# Altium PCB Fuse_Board_V2.PcbDoc
Units mil, origin at the board's own origin, x right, y up, seen from the top; angles counter-clockwise.
Board outline 5300 x 2200 mil, 2 copper layers (Top Layer, Bottom Layer); 46 components, 21 nets, 114 pads, 10 vias.
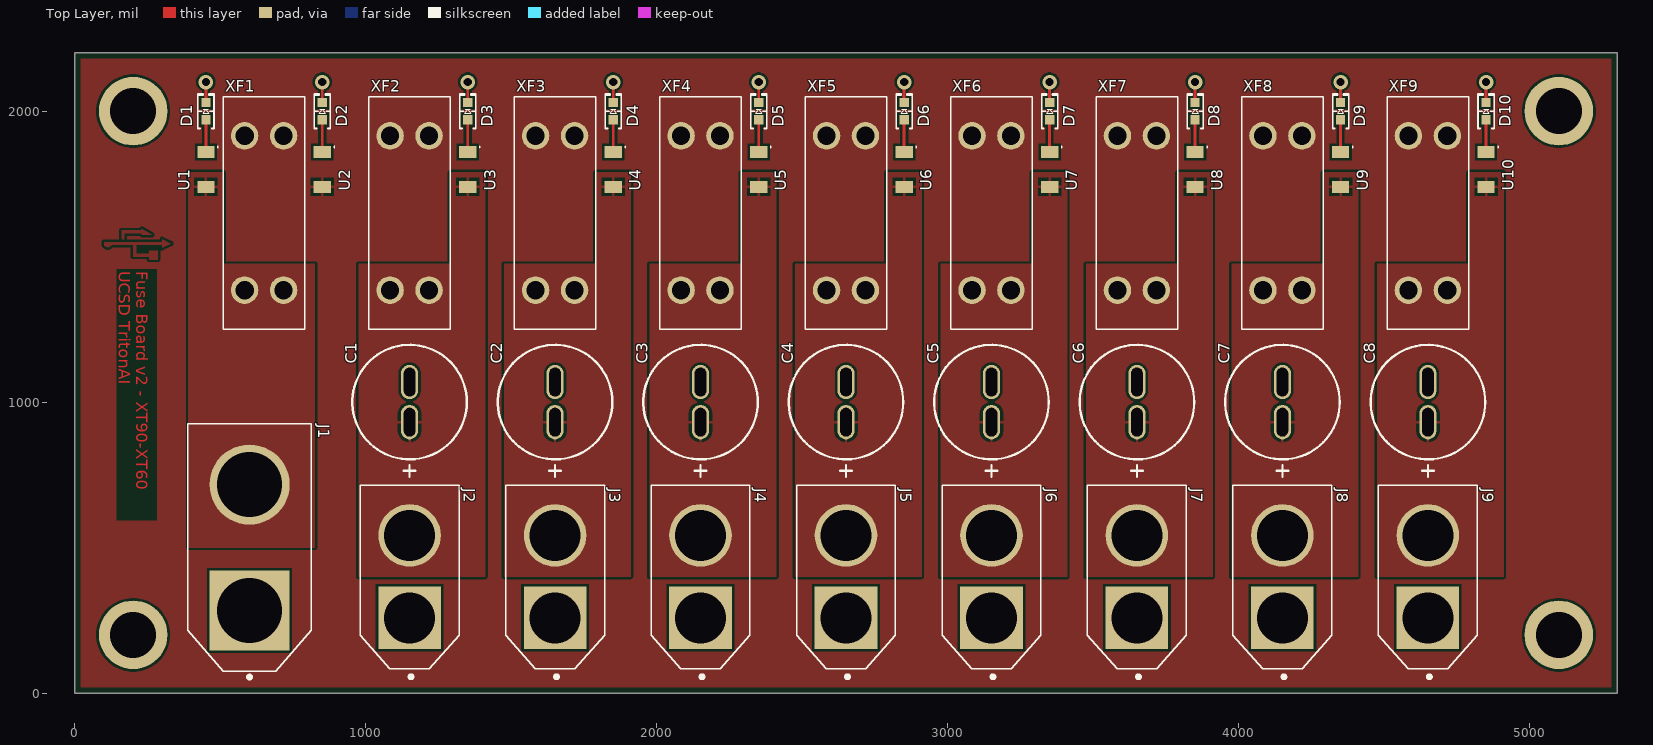
[diagram p0: Top Layer view]
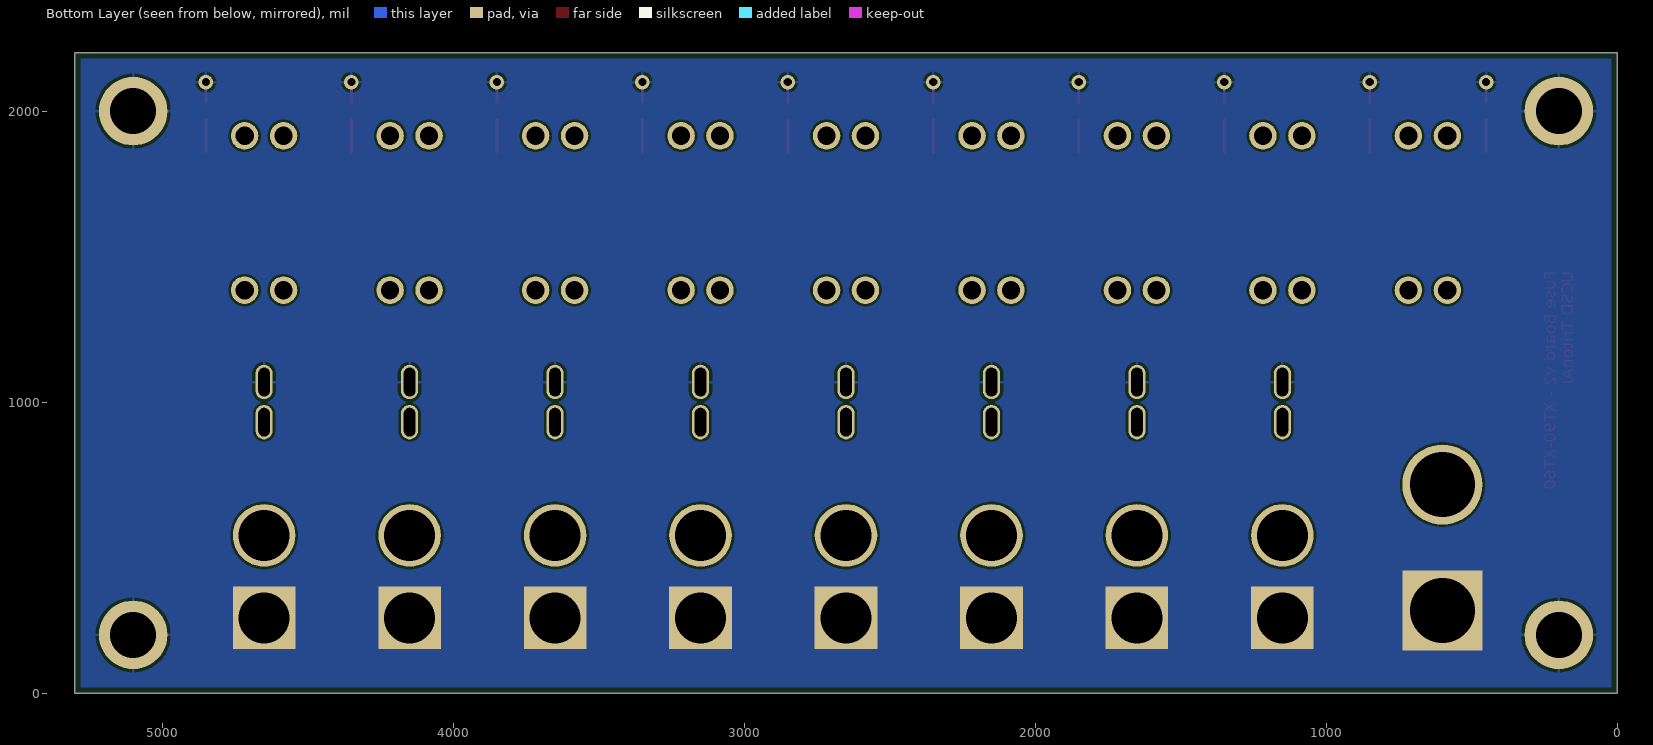
[diagram p1: Bottom Layer view, seen from below]
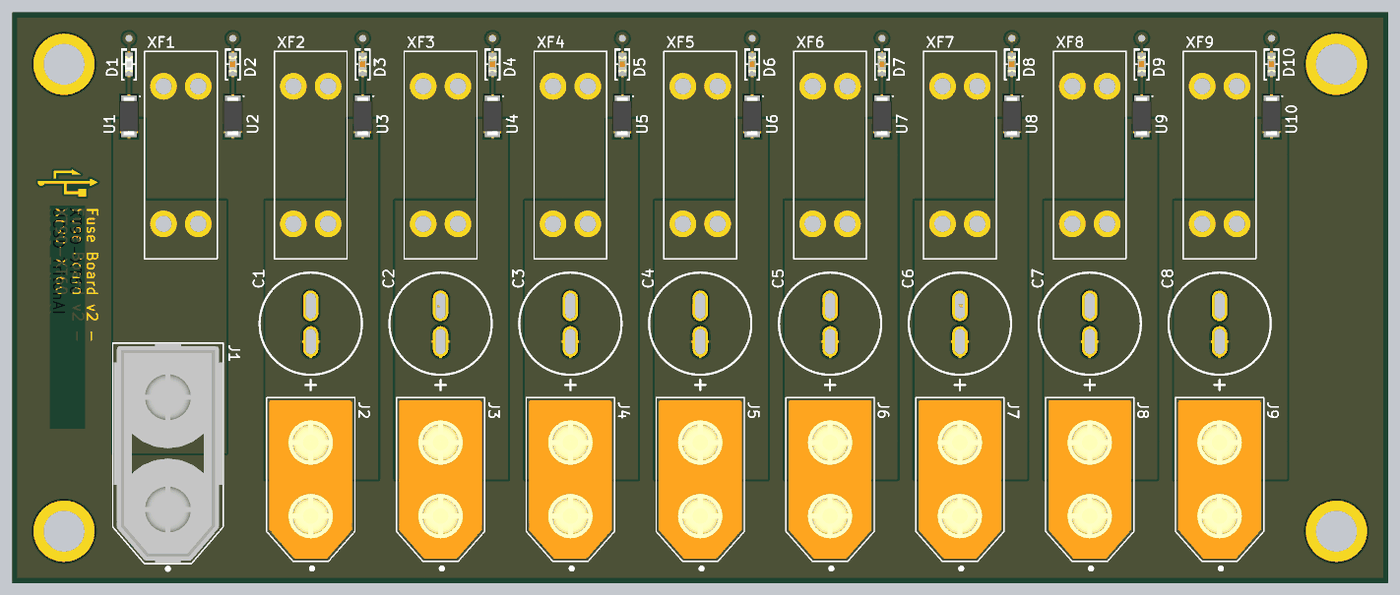
[diagram p2: 3D render of the assembled board from above, using the file's embedded part models]

## Layer stack, top to bottom
Top Solder: solder mask 0.4, Solder Resist, Dk 3.5
Top Layer: signal copper 1.4
Dielectric 1: dielectric 12.6, FR-4, Dk 4.8
Bottom Layer: signal copper 1.4
Bottom Solder: solder mask 0.4, Solder Resist, Dk 3.5

## Board outline
0,0 5300,0 5300,2200 0,2200

## Design rules (kind name [scope] priority, off if disabled: settings)
Clearance [All] p1: gap=7.87 ignorepadtopadclearanceinfootprint=FALSE except(5: Arc-Arc Arc-Track Track-Track SMDPad-SMDPad; 5.91: Arc-Text Track-Text SMDPad-Text THPad-Text Via-Text Fill-Text Poly-Text Region-Text Text-Text; 10: Arc-Via Arc-Hole Track-Via Track-Hole Via-Via; 12.99: Arc-THPad Track-THPad; 19.68: THPad-THPad)
DiffPairsRouting DiffPair_DIFF120DiffPairsRouting [InDifferentialPairClass('DIFF120')] p1: maxlimit=5 minlimit=5 mostfreqgap=5 toplayer_minwidth=5 toplayer_maxwidth=5 toplayer_prefwidth=5 bottomlayer_minwidth=5 bottomlayer_maxwidth=5 bottomlayer_prefwidth=5 maxuncoupledlength=500
DiffPairsRouting [All] p2: maxlimit=10 minlimit=5 mostfreqgap=10 toplayer_minwidth=5 toplayer_maxwidth=15 toplayer_prefwidth=15 bottomlayer_minwidth=5 bottomlayer_maxwidth=15 bottomlayer_prefwidth=15 maxuncoupledlength=500
HoleSize "Drill Hole" [InDrillLayerPair('Top Layer - Bottom Layer')] p1: absolutevalues=TRUE maxlimit=248.03 minlimit=7.87 maxpercent=80.000 minpercent=20.000
HoleSize [All] p2: absolutevalues=TRUE maxlimit=250 minlimit=7.87 maxpercent=80.000 minpercent=20.000
HoleToHoleClearance [All] p1: gap=19.68 allowstackedmicrovias=TRUE
MatchedLengths DiffPair_DIFF120MatchedLengths [InDifferentialPairClass('DIFF120')] p1: tolerance=1000 checknetsindiffpair=FALSE checkdiffpairvsdiffpair=TRUE checkxsignals=TRUE checkothers=TRUE
PolygonConnect PolygonConnect_Fuse_Holder [Name Like 'XF*'] p1: connectstyle=Direct reliefconductorwidth=10 reliefentries=4 polygonreliefangle="90 Angle" airgapwidth=10
PolygonConnect PolygonConnect_XT [Name Like 'J*'] p2: connectstyle=Direct reliefconductorwidth=10 reliefentries=4 polygonreliefangle="90 Angle" airgapwidth=10
PolygonConnect [All] p3: connectstyle=Relief reliefconductorwidth=10 reliefentries=4 polygonreliefangle="90 Angle" airgapwidth=10
RoutingVias [All] p1: holewidth=11.81 width=23.62 viastyle="Through Hole" minholewidth=11.81 minwidth=23.62 maxholewidth=248.03 maxwidth=248.03
SilkToSolderMaskClearance [IsPad] p1: minsilkscreentomaskgap=5.91 clearancetoexposedcopper=TRUE
SolderMaskExpansion [All] p1: expansion=4 istentingtop=FALSE
Width [All] p1: maxlimit=20 minlimit=5 preferedwidth=10
26 further rules are at their usual default settings.

## Components (designator, comment, footprint, x,y, rotation, side; value= is the part's Value field where it differs from the comment)
C1 "Capacitor Generic" RADIAL_CAP_10mm 1150,1000 r270 top
C2 "Capacitor Generic" RADIAL_CAP_10mm 1650,1000 r270 top
C3 "Capacitor Generic" RADIAL_CAP_10mm 2150,1000 r270 top
C4 "Capacitor Generic" RADIAL_CAP_10mm 2650,1000 r270 top
C5 "Capacitor Generic" RADIAL_CAP_10mm 3150,1000 r270 top
C6 "Capacitor Generic" RADIAL_CAP_10mm 3650,1000 r270 top
C7 "Capacitor Generic" RADIAL_CAP_10mm 4150,1000 r270 top
C8 "Capacitor Generic" RADIAL_CAP_10mm 4650,1000 r270 top
D1 "Green" "LED 0603_1608 GREEN" 450,2000 r90 top
D2 "Red" "LED 0603_1608 RED" 850,2000 r90 top
D3 "Red" "LED 0603_1608 RED" 1350,2000 r90 top
D4 "Red" "LED 0603_1608 RED" 1850,2000 r90 top
D5 "Red" "LED 0603_1608 RED" 2350,2000 r90 top
D6 "Red" "LED 0603_1608 RED" 2850,2000 r90 top
D7 "Red" "LED 0603_1608 RED" 3350,2000 r90 top
D8 "Red" "LED 0603_1608 RED" 3850,2000 r90 top
D9 "Red" "LED 0603_1608 RED" 4350,2000 r90 top
D10 "Red" "LED 0603_1608 RED" 4850,2000 r90 top
J1 "XT90PB-M" XT90PB-M 600,500 r90 top
J2 "XT60-M" AMASS_XT60-M 1150,400 r90 top
J3 "XT60-M" AMASS_XT60-M 1650,400 r90 top
J4 "XT60-M" AMASS_XT60-M 2150,400 r90 top
J5 "XT60-M" AMASS_XT60-M 2650,400 r90 top
J6 "XT60-M" AMASS_XT60-M 3150,400 r90 top
J7 "XT60-M" AMASS_XT60-M 3650,400 r90 top
J8 "XT60-M" AMASS_XT60-M 4150,400 r90 top
J9 "XT60-M" AMASS_XT60-M 4650,400 r90 top
U1 "AL5809-15P1-7" POWERDI_123 450,1800 r90 top
U2 "AL5809-15P1-7" POWERDI_123 850,1800 r90 top
U3 "AL5809-15P1-7" POWERDI_123 1350,1800 r90 top
U4 "AL5809-15P1-7" POWERDI_123 1850,1800 r90 top
U5 "AL5809-15P1-7" POWERDI_123 2350,1800 r90 top
U6 "AL5809-15P1-7" POWERDI_123 2850,1800 r90 top
U7 "AL5809-15P1-7" POWERDI_123 3350,1800 r90 top
U8 "AL5809-15P1-7" POWERDI_123 3850,1800 r90 top
U9 "AL5809-15P1-7" POWERDI_123 4350,1800 r90 top
U10 "AL5809-15P1-7" POWERDI_123 4850,1800 r90 top
XF1 "3557-2" FUSE_3557-2 650,1650 r90 top
XF2 "3557-2" FUSE_3557-2 1150,1650 r270 top
XF3 "3557-2" FUSE_3557-2 1650,1650 r270 top
XF4 "3557-2" FUSE_3557-2 2150,1650 r270 top
XF5 "3557-2" FUSE_3557-2 2650,1650 r270 top
XF6 "3557-2" FUSE_3557-2 3150,1650 r270 top
XF7 "3557-2" FUSE_3557-2 3650,1650 r270 top
XF8 "3557-2" FUSE_3557-2 4150,1650 r270 top
XF9 "3557-2" FUSE_3557-2 4650,1650 r270 top

## Footprints (in the part's own frame and the unit in brackets; to place one, negate y for a bottom-side part, rotate by r counter-clockwise, add the part's x,y. Pads: shape width x height; smd on the part's side, far side on the other; paste and mask are expansions set on the pad)
AMASS_XT60-M [mil]
  rect 215x215 hole 175: 1(-141.73,0)
  round 215 hole 175: 2(141.73,0)
  silkscreen extent -350,-170 315,170, body extent -305,-159 305,159, height 630
FUSE_3557-2 [mm]
  round 2.4 hole 1.6: 1(-6.735,-1.7) 1(-6.735,1.7) 2(6.735,-1.7) 2(6.735,1.7)
  silkscreen extent -10.16,-3.56 10.16,3.56, body extent -9.91,-3.38 9.91,3.38, height 7.4
"LED 0603_1608 GREEN" [mm] "Chip Diode, 2-Leads, Body 1.60x0.80mm, IPC Medium Density"
  rect 0.8x0.8 smd: 1(-0.75,0) 2(0.75,0)
  silkscreen extent -1.52,-0.7 1.52,0.7, body extent -0.8,-0.4 0.8,0.4, height 0.53
"LED 0603_1608 RED" [mm] "Chip Diode, 2-Leads, Body 1.60x0.80mm, IPC Medium Density"
  rect 0.8x0.8 smd: 1(-0.75,0) 2(0.75,0)
  silkscreen extent -1.52,-0.7 1.52,0.7, body extent -0.8,-0.4 0.8,0.4, height 0.53
POWERDI_123 [mm] "POWERDI-123, 2-Leads, Body 1.78x3.70mm"
  rect 1.05x1.5 smd: 1(-1.525,0) 2(1.525,0)
  silkscreen extent 1.9,-1.1 2,-1, body extent -1.85,-0.96 1.85,0.96, height 1
RADIAL_CAP_10mm [mm]
  oval 3x1.5 hole 1 slot 2.5 at 0 deg: 1(-1.75,0) 2(1.75,0)
  silkscreen extent -5,-5 6.51,5
XT90PB-M [mm]
  rect 7x7 hole 5.7: 1(-5.5,0)
  round 7 hole 5.7: 2(5.5,0)
  silkscreen extent -11.45,-5.4 10.8,5.4, body extent -10.7,-5.4 10.7,5.3, height 21

## Part data
C1 C2 C3 C4 C5 C6 C7 C8: "Cap Radial Aluminum Cylindrical Can 3.5mm, 5mm", Package="RADIAL-2 Panasonic", Availability="In Stock", Check_prices=https://www.snapeda.com/parts/ECA-2WHG220/Panasonic/view-part/390097/?ref=eda, MF=Panasonic, MP=ECA-2WHG220, Price=None, SnapEDA_Link=https://www.snapeda.com/parts/ECA-2WHG220/Panasonic/view-part/390097/?ref=snap
D1: library part LTST-C193TGKT-5A, "LED GREEN CLEAR CHIP SMD", Current - Test=5mA, Device Package="0603 (1608 Metric)", Lens Color=Colorless, Manufacturer="Lite-On Inc.", Millicandela Rating=154mcd, Supplier Device Package="Chip LED", Supplier Part Number 1=160-1832-1-ND, Voltage - Forward (Vf) (Typ)=2.8V, Color=Green, ComponentLink1Description=Datasheet, ComponentLink1URL=//media.digikey.com/pdf/Data%20Sheets/Lite-On%20PDFs/LTST-C193TGKT-5A.pdf, ComponentLink2Description="DigiKey Link", ComponentLink2URL=http://digikey.com/product-detail/en/lite-on-inc/LTST-C193TGKT-5A/160-1832-1-ND/2356255, Configuration=Standard, Height (Max)=0.45mm, LastUpdated="9/2/2020 1:20:42 AM", Lens Size="1.15mm x 0.80mm", Lens Style="Rectangle with Flat Top", Lens Transparency=Clear, Lifecycle Status=Active, Minimum Order=1, Mounting Type="Surface Mount", Package / Case="0603 (1608 Metric)", Packaging=TapeAndReel, Part Number=LTST-C193TGKT-5A, Part Status=Active, PartId=644, Price=0.10, Series=-, Size / Dimension="1.60mm L x 0.80mm W", Supplier 1=DigiKey, Viewing Angle=130°, Wavelength - Dominant=528nm, Wavelength - Peak=525nm
D2 D3 D4 D5 D6 D7 D8 D9 D10: library part 19-217/R6C-AL1M2VY/3T, "LED RED CLEAR 2SMD", Current - Test=5mA, Device Package="0603 (1608 Metric)", Lens Color=Colorless, Manufacturer="Everlight Electronics Co Ltd", Supplier Device Package=2-SMD, Supplier Part Number 1=1080-1585-1-ND, Voltage - Forward (Vf) (Typ)=1.95V, Color=Red, ComponentLink1Description=Datasheet, ComponentLink1URL=//media.digikey.com/pdf/Data%20Sheets/Everlight%20PDFs/19-217-R6C-AL1M2VY-3T.pdf, ComponentLink2Description="DigiKey Link", ComponentLink2URL=http://digikey.com/product-detail/en/everlight-electronics-co-ltd/19-217-R6C-AL1M2VY-3T/1080-1585-1-ND/8535308, Configuration=Standard, Height (Max)=0.50mm, LastUpdated="9/2/2020 1:20:56 AM", Lens Size="1.00mm x 0.80mm", Lens Style="Rectangle with Flat Top", Lens Transparency=Clear, Lifecycle Status=Active, Minimum Order=1, Mounting Type="Surface Mount", Package / Case="0603 (1608 Metric)", Packaging=TapeAndReel, Part Number=19-217/R6C-AL1M2VY/3T, Part Status=Active, PartId=419, Price=0.05, Series=-, Size / Dimension="1.60mm L x 0.80mm W", Supplier 1=DigiKey, Viewing Angle=120°, Wavelength - Peak=632nm
J1 J2 J3 J4 J5 J6 J7 J8 J9: "Plug; DC supply; XT60; male; PIN: 2; for cable; soldered; 30A; 500V", Package="Package Analog Devices", Availability=Unavailable, MF=AMASS, MP=XT60-M, Price=None, SnapEDA_Link=https://www.snapeda.com/parts/XT60-M/AMASS/view-part/2883912/?ref=snap
U1 U2 U3 U4 U5 U6 U7 U8 U9 U10: "LED Driver IC 1 Output Linear - PWM Dimming 15mA PowerDI™ 123"
XF1 XF2 XF3 XF4 XF5 XF6 XF7 XF8 XF9: "Fuse Block 30A 500V 1 Circuit Blade Through Hole", Package="Nonstandard Keystone", Availability=Unavailable, MF="Keystone Electronics", MP=3557-2, Price=None, SnapEDA_Link=https://www.snapeda.com/parts/3557-2/Keystone%20Electronics/view-part/278060/?ref=snap

## Free pads (board coordinates)
  round 236.22 hole 157.48: ""(200,200) ""(200,2000) ""(5100,200) ""(5100,2000)

## Via types
v1: diameter 50, hole 28, Top Layer to Bottom Layer, tented both sides, 10 vias

## Nets (pads, with @x,y where several pads share a name; then routed paths per layer and width w, separated by ;. In a path a pad name is that pad's centre, name@x,y a point inside that pad or via, vN(x,y) a via of type N, cw(c..) or ccw(c..) an arc to the next point about the centre after c; other vN are vias at no path point)
GND: C1.1 C2.1 C3.1 C4.1 C5.1 C6.1 C7.1 C8.1 D1.2 D2.2 D3.2 D4.2 D5.2 D6.2 D7.2 D8.2 D9.2 D10.2 J1.1 J2.1 J3.1 J4.1 J5.1 J6.1 J7.1 J8.1 J9.1 pad. | length 704.7
  Top Layer w10: D1.2 v1(450,2100) ; D2.2 v1(850,2100) ; D3.2 v1(1350,2100) ; D4.2 v1(1850,2100) ; D5.2 v1(2350,2100) ; D6.2 v1(2850,2100) ; D7.2 v1(3350,2100) ; D8.2 v1(3850,2100) ; D9.2 v1(4350,2100) ; D10.2 v1(4850,2100)
NetD1_1: D1.1 U1.2 | length 110.4
  Top Layer w10: U1.2 D1.1
NetD2_1: D2.1 U2.2 | length 110.4
  Top Layer w10: U2.2 D2.1
NetD3_1: D3.1 U3.2 | length 110.4
  Top Layer w10: U3.2 D3.1
NetD4_1: D4.1 U4.2 | length 110.4
  Top Layer w10: U4.2 D4.1
NetD5_1: D5.1 U5.2 | length 110.4
  Top Layer w10: U5.2 D5.1
NetD6_1: D6.1 U6.2 | length 110.4
  Top Layer w10: U6.2 D6.1
NetD7_1: D7.1 U7.2 | length 110.4
  Top Layer w10: U7.2 D7.1
NetD8_1: D8.1 U8.2 | length 110.4
  Top Layer w10: U8.2 D8.1
NetD9_1: D9.1 U9.2 | length 110.4
  Top Layer w10: U9.2 D9.1
NetD10_1: D10.1 U10.2 | length 110.4
  Top Layer w10: U10.2 D10.1
OUT1: C1.2 J2.2 U3.1 XF2.2
OUT2: C2.2 J3.2 U4.1 XF3.2
OUT3: C3.2 J4.2 U5.1 XF4.2
OUT4: C4.2 J5.2 U6.1 XF5.2
OUT5: C5.2 J6.2 U7.1 XF6.2
OUT6: C6.2 J7.2 U8.1 XF7.2
OUT7: C7.2 J8.2 U9.1 XF8.2
OUT8: C8.2 J9.2 U10.1 XF9.2
VCC: U2.1 XF1.2 XF2.1 XF3.1 XF4.1 XF5.1 XF6.1 XF7.1 XF8.1 XF9.1
VIN: J1.2 U1.1 XF1.1

## Polygon pours and split planes (outlines as drawn)
no net on Top Layer "NONET_L01_P075" (solid, pour order 75): 100,1540 ccw(c112.5,1545.88) 125,1540 200,1540 200,1500 255,1500 255,1490 285,1490 285,1520 255,1520 255,1510 210,1510 210,1540 300,1540 300,1530 330,1545 300,1560 300,1550 100,1550
no net on Top Layer "NONET_L01_P077" (solid, pour order 77): 160,1560 170,1560 170,1580 230,1580 230,1575 265,1575 230,1595 230,1590 160,1590
OUT3 on Top Layer "OUT3_L01_P069" (solid, pour order 69): 2290,1475 2290,1790 2410,1790 2410,400 1975,400 1975,1475
OUT8 on Top Layer "OUT8_L01_P074" (solid, pour order 74): 4790,1475 4790,1790 4910,1790 4910,400 4475,400 4475,1475
OUT7 on Top Layer "OUT7_L01_P073" (solid, pour order 73): 4290,1475 4290,1790 4410,1790 4410,400 3975,400 3975,1475
OUT6 on Top Layer "OUT6_L01_P072" (solid, pour order 72): 3790,1475 3790,1790 3910,1790 3910,400 3475,400 3475,1475
OUT5 on Top Layer "OUT5_L01_P071" (solid, pour order 71): 3290,1475 3290,1790 3410,1790 3410,400 2975,400 2975,1475
OUT4 on Top Layer "OUT4_L01_P070" (solid, pour order 70): 2790,1475 2790,1790 2910,1790 2910,400 2475,400 2475,1475
OUT2 on Top Layer "OUT2_L01_P068" (solid, pour order 68): 1790,1475 1790,1790 1910,1790 1910,400 1475,400 1475,1475
VCC on Top Layer "VCC_L01_P078" (solid, pour order 78): 20,2180.01 20,20 5280,20 5280,2179.98
OUT1 on Top Layer "OUT1_L01_P067" (solid, pour order 67): 1290,1475 1290,1790 1410,1790 1410,400 975,400 975,1475
VIN on Top Layer "VIN_L01_P066" (solid, pour order 66): 390,1790 510,1790 510,1475 825,1475 825,500 390,500
no net on Top Solder "NONET_L01_P083" (solid, pour order 83): 100,1540 ccw(c112.5,1545.88) 125,1540 200,1540 200,1500 255,1500 255,1490 285,1490 285,1520 255,1520 255,1510 210,1510 210,1540 300,1540 300,1530 330,1545 300,1560 300,1550 100,1550
no net on Top Solder "NONET_L01_P084" (solid, pour order 84): 160,1560 170,1560 170,1580 230,1580 230,1575 265,1575 230,1595 230,1590 160,1590
GND on Bottom Layer "GND_L02_P076" (solid, pour order 76): 5280,20 5280,2180 20,2180 20,20

## Other copper
Top Layer:
  text "Fuse Board v2 - XT90-XT60 / UCSD TritonAI" at 150,1450 h40 r270

## Silkscreen, mask and mechanical layers (free items; w line width, h text height)
Top Solder:
  text "Fuse Board v2 - XT90-XT60 / UCSD TritonAI" at 150,1450 h40 r270